# Allegro board SHOWERTERMINAL.brd
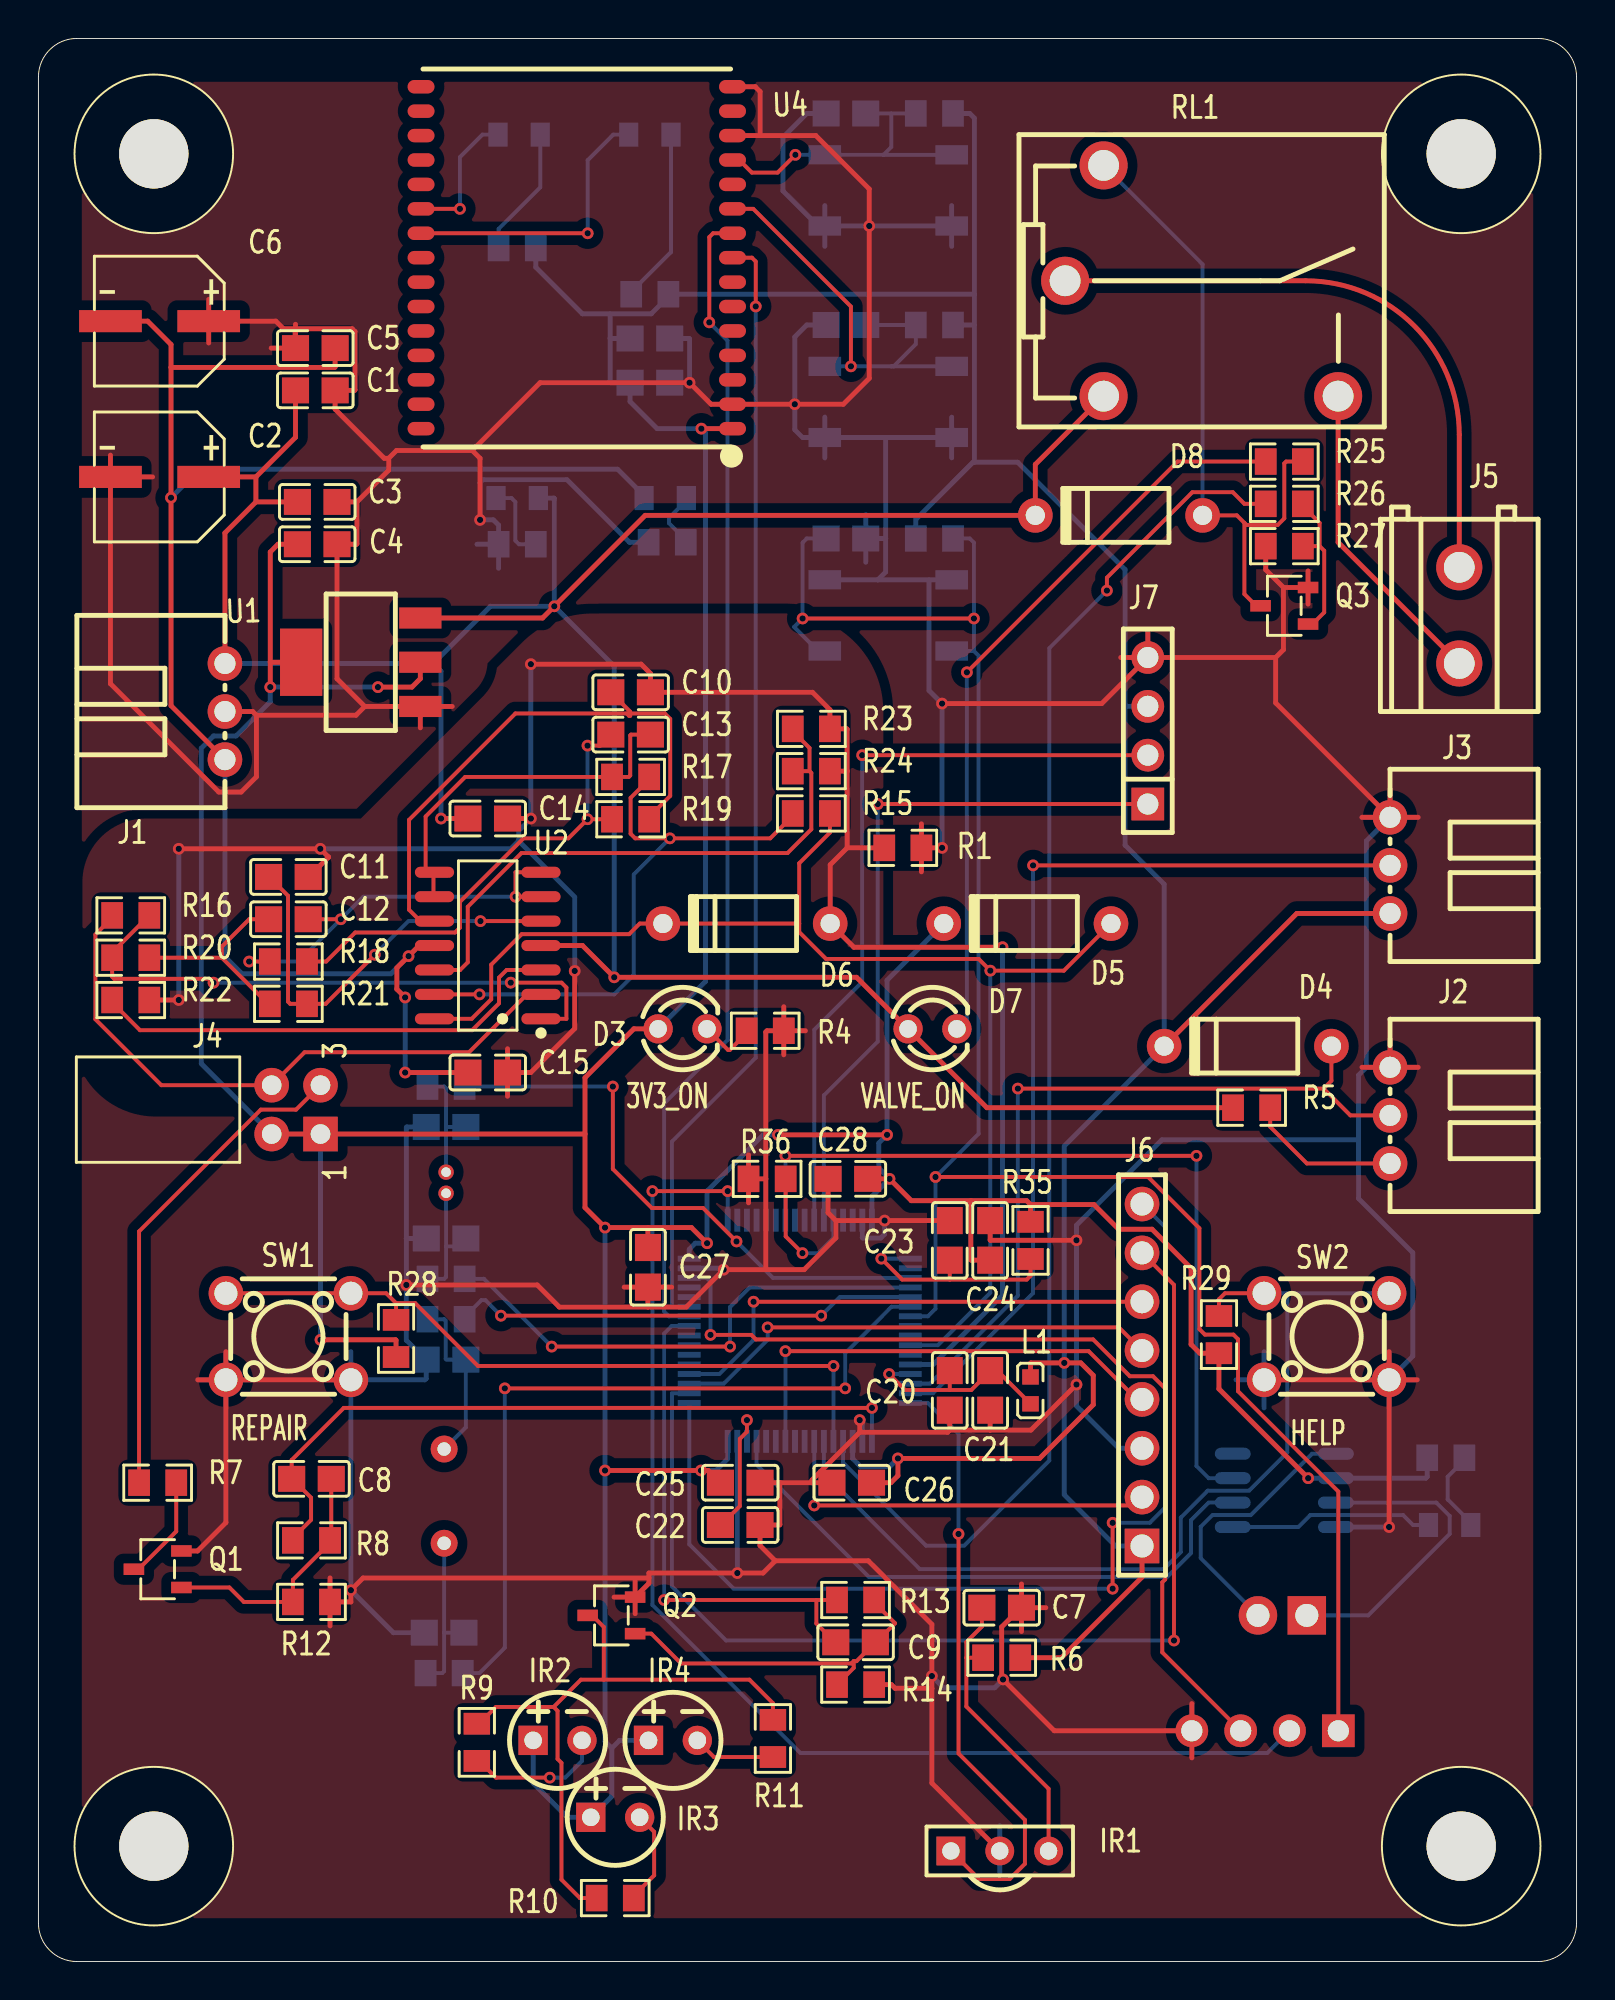
[diagram p0: board, top side]
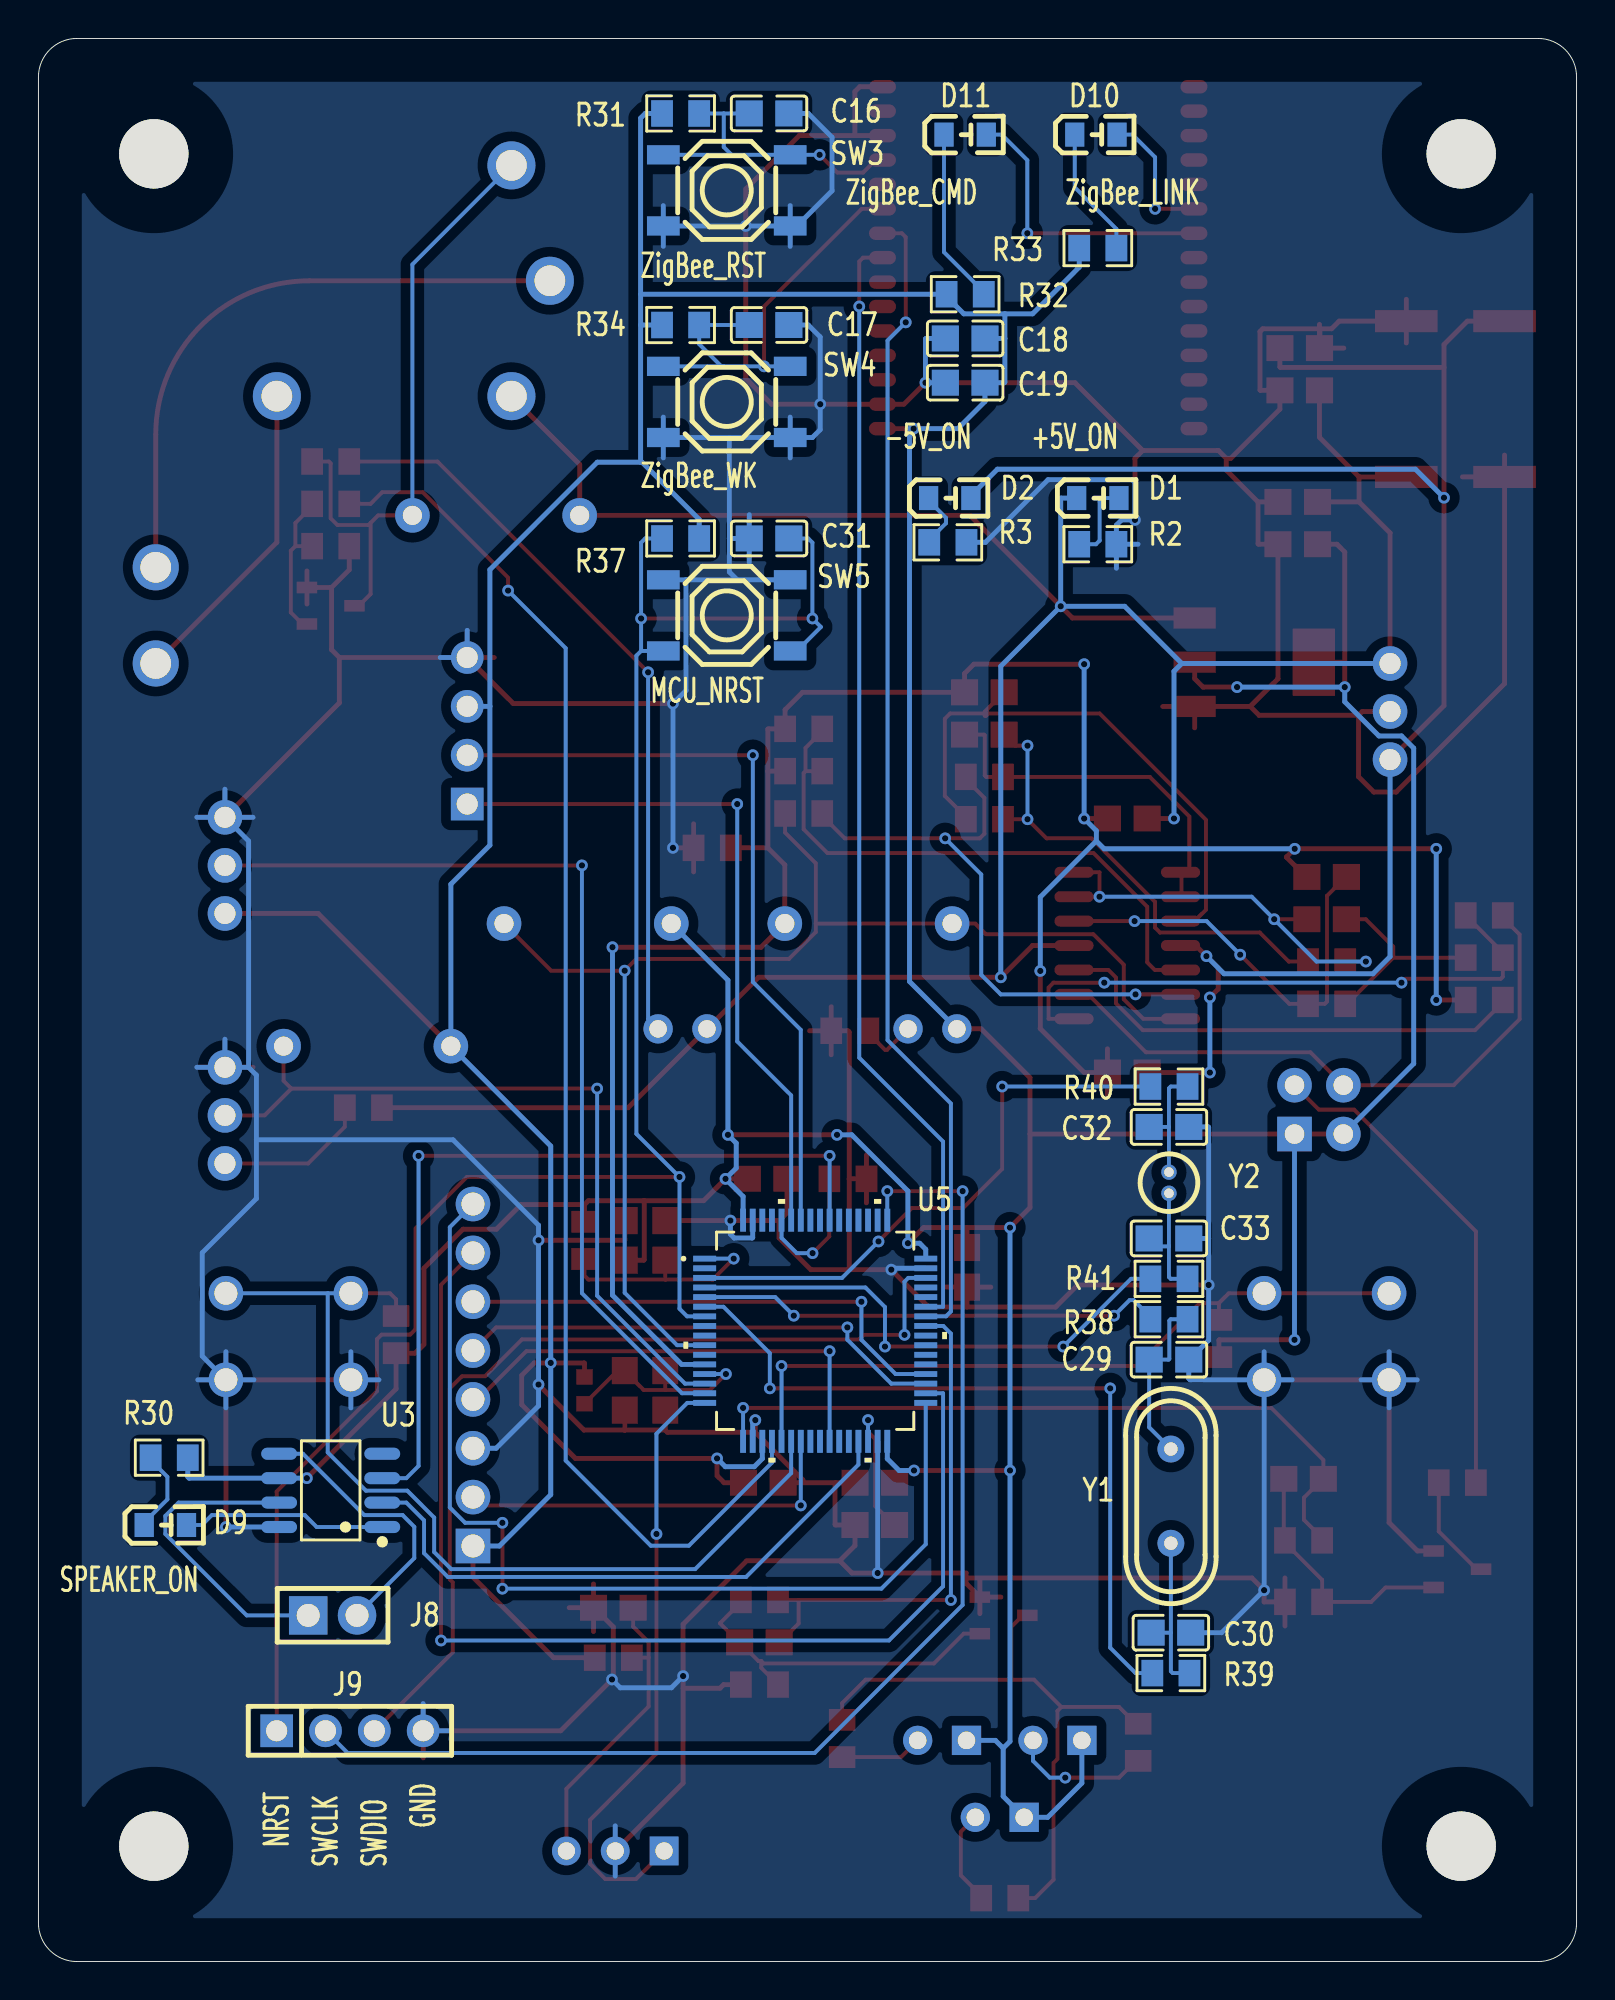
[diagram p1: board, bottom side, seen from below]

Outline 80 x 100 mm; copper layers: TOP, BOTTOM. Coordinates in mm from the lower left corner of the outline.
Outline path: 0,98 arc(0.59,99.41) 2,100 78,100 arc(79.41,99.41) 80,98 80,2 arc(79.41,0.59) 78,0 2,0 arc(0.59,0.59) 0,2 0,98

## Design rules (mm)
constraint set DEFAULT: min track width 0.203, pair gap 0.203
nets with their own width: min track width 0.254; nets 3V3 +5V -5V AGND GND

## Placement (name value [footprint] x y rotation side)
C1  100n  [C0805]  14.4 81.7 0 top
C2  220u  [C-220U]  6.3 77.2 0 top
C3  1u  [C0805]  14.5 75.9 0 top
C4  1u  [C0805]  14.5 73.7 0 top
C5  100n  [C0805]  14.4 83.9 0 top
C6  220u  [C-220U]  6.3 85.3 0 top
C7  47u  [C0805]  50.1 18.4 0 top
C8  100n  [C0805]  14.2 25.1 0 top
C9  100n  [C0805]  42.5 16.6 0 top
C10  100n  [C0805]  30.8 66 0 top
C11  100n  [C0805]  13 56.4 0 top
C12  1u  [C0805]  13 54.2 0 top
C13  1u  [C0805]  30.8 63.8 0 top
C14  100n  [C0805]  23.37 59.44 0 top
C15  100n  [C0805]  23.37 46.23 0 top
C16  100n  [C0805]  42 96.1 180 bottom
C17  100n  [C0805]  42 85.1 180 bottom
C18  10u  [C0805]  31.8 84.4 180 bottom
C19  100n  [C0805]  31.8 82.1 180 bottom
C20  1u  [C0805]  47.4 29.7 90 top
C21  100n  [C0805]  49.5 29.7 90 top
C22  2.2u  [C0805]  36.5 22.7 180 top
C23  1u  [C0805]  47.4 37.5 90 top
C24  100n  [C0805]  49.5 37.5 90 top
C25  100n  [C0805]  42.3 24.9 180 top
C26  100n  [C0805]  36.5 24.9 0 top
C27  100n  [C0805]  31.7 36.1 270 top
C28  100n  [C0805]  42.1 40.7 180 top
C29  20pF  [C0805]  21.2 31.3 180 bottom
C30  20pF  [C0805]  21.1 17.1 180 bottom
C31  100n  [C0805]  42 74 180 bottom
C32  15pF  [C0805]  21.2 43.4 180 bottom
C33  15pF  [C0805]  21.2 37.6 180 bottom
D1  +5V_ON  [LED0805-RD]  24.9 76.1 180 bottom
D2  -5V_ON  [LED0805-RD]  32.6 76.1 180 bottom
D3  3V3_ON  [LED-TH_BD3_0-P2_54-FD]  33.5 48.5 0 top
D4  1N4007  [DO-41_BD2_4-L4_7-P8_70-D0_6-RD]  62.9 47.6 0 top
D5  1N4007  [DO-41_BD2_4-L4_7-P8_70-D0_6-RD]  51.44 53.98 0 top
D6  1N4007  [DO-41_BD2_4-L4_7-P8_70-D0_6-RD]  36.83 53.98 0 top
D7  VALVE_ON  [LED-TH_BD3_0-P2_54-FD]  46.5 48.5 0 top
D8  1N4007  [DO-41_BD2_4-L4_7-P8_70-D0_6-RD]  56.2 75.2 0 top
D9  SPEAKER_ON  [LED0805-RD]  73.4 22.7 180 bottom
D10  ZigBee_LINK  [LED0805-RD]  25 95 180 bottom
D11  ZigBee_CMD  [LED0805-RD]  31.8 95 180 bottom
IR1  IR-56384  [OPTO-TH_IRM-56384]  50 5.75 0 top
IR2  DY-IR333C-A  [LED-TH_BD5_9-P2_54-FD]  27 11.5 0 top
IR3  DY-IR333C-A  [LED-TH_BD5_9-P2_54-FD]  30 7.5 0 top
IR4  DY-IR333C-A  [LED-TH_BD5_9-P2_54-FD]  33 11.5 0 top
J1  RH-30W_PORT  [CONN-TH_3P-P2_50_HX25003-3WAP]  9.7 65 270 top
J2  FLOWMETER_PORT  [CONN-TH_3P-P2_50_HX25003-3WAP]  70.3 44 90 top
J3  DS18B20_PORT  [CONN-TH_3P-P2_50_HX25003-3WAP]  70.3 57 90 top
J4  INFRARED  [CONN-TH_4P-P2_54_DEALON_DW254W-22-04-85]  13.4 44.3 90 top
J5  VALVE_PORT  [CONN-TH_P5_00_KF127-5_0-2P]  73.9 70 270 top
J6  NFC_PORT  [HDR-TH_8P-P2_54-V-F-1]  57.4 30.5 90 top
J7  LCD_PORT  [HDR-TH_4P-P2_54-V-F]  57.7 64 90 top
J8  SPEAKER_PORT  [HDR-TH_2P-P2_54-V-F]  64.7 18 180 bottom
J9  SWD_PORT  [HDR-TH_4P-P2_54-V-F]  63.8 12 180 bottom
L1  FCM1608  [L0603]  51.6 29.7 90 top
NOREF  -  [unnamed]  6 6 0 top
NOREF#2  -  [unnamed]  6 94 0 top
NOREF#3  -  [unnamed]  74 94 0 top
NOREF#4  -  [unnamed]  74 6 0 top
Q1  S8050  [SOT-23-3_L2_9-W1_6-P1_90-LS2_8-BR]  6.2 20.4 0 top
Q2  S8050  [SOT-23-3_L2_9-W1_6-P1_90-LS2_8-BR]  29.8 18 0 top
Q3  S8050  [SOT-23-3_L2_9-W1_6-P1_90-LS2_8-BR]  64.8 70.5 0 top
R1  0  [R0805]  44.96 57.91 180 top
R2  1k  [R0805]  24.9 73.7 180 bottom
R3  1k  [R0805]  32.7 73.8 180 bottom
R4  1k  [R0805]  37.8 48.4 0 top
R5  1k  [R0805]  63.1 44.4 0 top
R6  220  [R0805]  50.1 15.8 0 top
R7  100  [R0805]  6.2 24.9 0 top
R8  11k  [R0805]  14.2 21.9 0 top
R9  100  [R0805]  22.8 11.4 90 top
R10  100  [R0805]  30 3.3 180 top
R11  100  [R0805]  38.2 11.6 90 top
R12  100k  [R0805]  14.2 18.7 0 top
R13  3.9k  [R0805]  42.5 18.8 0 top
R14  10k  [R0805]  42.5 14.4 0 top
R15  10k  [R0805]  40.2 59.7 0 top
R16  620  [R0805]  4.8 54.4 0 top
R17  10k  [R0805]  30.8 61.6 0 top
R18  91k  [R0805]  13 52 0 top
R19  27k  [R0805]  30.8 59.4 0 top
R20  330k  [R0805]  4.8 52.2 0 top
R21  9.1k  [R0805]  13 49.8 0 top
R22  620  [R0805]  4.8 50 0 top
R23  10k  [R0805]  40.2 64.1 0 top
R24  10k  [R0805]  40.2 61.9 0 top
R25  1k  [R0805]  64.8 78 0 top
R26  8.2k  [R0805]  64.8 75.8 0 top
R27  51k  [R0805]  64.8 73.6 0 top
R28  1k  [R0805]  18.6 32.4 90 top
R29  1k  [R0805]  61.4 32.6 90 top
R30  330  [R0805]  73.2 26.2 0 bottom
R31  10k  [R0805]  46.6 96.1 180 bottom
R32  1k  [R0805]  31.8 86.7 180 bottom
R33  1k  [R0805]  24.9 89.1 180 bottom
R34  10k  [R0805]  46.6 85.1 180 bottom
R35  0  [R0805]  51.6 37.5 90 top
R36  10k  [R0805]  37.9 40.7 0 top
R37  100k  [R0805]  46.6 74 180 bottom
R38  0  [R0805]  21.2 33.4 180 bottom
R39  220  [R0805]  21.1 15 180 bottom
R40  0  [R0805]  21.2 45.5 180 bottom
R41  0  [R0805]  21.2 35.5 180 bottom
RL1  973-5VDC-SL-A  [RELAY-TH_973-XXVDC-SL-A]  60.5 87.4 0 top
SW1  REPAIR  [SW-TH_4P-L6_0-W6_0-P4_50-LS6_5]  13 32.5 0 top
SW2  HELP  [SW-TH_4P-L6_0-W6_0-P4_50-LS6_5]  67 32.5 0 top
SW3  ZigBee_RST  [SW-SMD_4P-L5_1-W5_1-P3_70-LS6_5-TL-2]  44.2 92.1 180 bottom
SW4  ZigBee_WK  [SW-SMD_4P-L5_1-W5_1-P3_70-LS6_5-TL-2]  44.2 81.1 180 bottom
SW5  MCU_NRST  [SW-SMD_4P-L5_1-W5_1-P3_70-LS6_5-TL-2]  44.2 70 180 bottom
U1  TLV1117LV33  [SOT-223_L6_7-W3_5-P2_30-BR]  16.76 67.56 0 top
U2  TLV2374  [SOIC-14_L8_7-W3_9-P1_27-LS6_0-BL]  23.37 52.83 90 top
U3  WT588F08A-8S  [SOP-8_L4_9-W3_9-P1_27-LS6_0-BL]  64.8 24.5 90 bottom
U4  A40-C2G4A04S1a  [S24-PAD]  28 88.6 90 top
U5  STM32F401RE  [LQFP64-10X10MM]  39.6 32.8 180 bottom
Y1  8MHz  [OSC-TH_L11_1-W4_7-P4_88]  21.1 24.2 90 bottom
Y2  32.768kHz  [OSC-TH_BD3_0-P1_10-D0_4]  21.2 40.5 270 bottom

## Library data of the parts
C1 C3-C5 C7-C33 = CAP NP
C2 C6 = CAP
D1-D3 D7 D9-D11 IR2-IR4 = LED_1
D4-D6 D8 = DIODE
IR1 = IRM-56384
J1-J3 = CON3
J4 = CON4_0
J5 J8 = CON2
J6 = CON8
J7 J9 = CON4
L1 = CHOKE
Q1-Q3 = BPW36/TO_0
R1-R41 = RESISTOR
RL1 = RELAY SPST
SW1-SW5 = SW PUSHBUTTON-SPST-2
U1 = TLV1117LV33DCYR
U2 = TLV2374ID
U3 = WT588F08A-8S
U4 = A40-C2G4A04S1a_0
U5 = STM32F401RET6_0
Y1 Y2 = CRYSTAL

## Footprints (pads in the part's own frame, mm; a bottom-side part is the same pattern mirrored in y, then rotated)
C0805
  rect 1.41x1.35 smd: 1(-1.03,0) 2(1.03,0)
C-220U
  rect 3.26x1.15 smd: 1(2.555,0) 2(-2.555,0)
CONN-TH_3P-P2_50_HX25003-3WAP
  round 1.8 hole 1.1: 1(-2.5,0) 2(0,0) 3(2.5,0)
CONN-TH_4P-P2_54_DEALON_DW254W-22-04-85
  rect 1.8x1.8 hole 1.02: 1(-1.27,-1.27)
  round 1.8 hole 1.02: 2(-1.27,1.27) 3(1.27,-1.27) 4(1.27,1.27)
CONN-TH_P5_00_KF127-5_0-2P
  round 2.4 hole 1.6: 1(-2.5,0) 2(2.5,0)
DO-41_BD2_4-L4_7-P8_70-D0_6-RD
  round 1.8 hole 1: 1(-4.35,0) 2(4.35,0)
HDR-TH_2P-P2_54-V-F
  rect 2x2 hole 1.2: 1(-1.27,0)
  round 2 hole 1.2: 2(1.27,0)
HDR-TH_4P-P2_54-V-F
  rect 1.7x1.7 hole 1.1: 1(-3.81,0)
  round 1.7 hole 1.1: 2(-1.27,0) 3(1.27,0) 4(3.81,0)
HDR-TH_8P-P2_54-V-F-1
  rect 1.8x1.8 hole 1.2: 1(-8.89,0)
  round 1.8 hole 1.2: 2(-6.35,0) 3(-3.81,0) 4(-1.27,0) 5(1.27,0) 6(3.81,0) 7(6.35,0) 8(8.89,0)
L0603
  rect 0.8x0.864 smd: 1(-0.7,0) 2(0.7,0)
LED0805-RD
  rect 1x1.25 smd: 1(-1.1,0) 2(1.1,0)
LED-TH_BD3_0-P2_54-FD
  round 1.524 hole 0.914: 1(-1.27,0) 2(1.27,0)
LED-TH_BD5_9-P2_54-FD
  rect 1.524x1.524 hole 0.914: 1(-1.27,0)
  round 1.524 hole 0.914: 2(1.27,0)
LQFP64-10X10MM
  rect 1.194x0.305 smd: 1(-5.75,3.75) 2(-5.75,3.25) 3(-5.75,2.75) 4(-5.75,2.25) 5(-5.75,1.75) 6(-5.75,1.25) 7(-5.75,0.75) 8(-5.75,0.25) 9(-5.75,-0.25) 10(-5.75,-0.75) 11(-5.75,-1.25) 12(-5.75,-1.75) 13(-5.75,-2.25) 14(-5.75,-2.75) 15(-5.75,-3.25) 16(-5.75,-3.75) 33(5.75,-3.75) 34(5.75,-3.25) 35(5.75,-2.75) 36(5.75,-2.25) 37(5.75,-1.75) 38(5.75,-1.25) 39(5.75,-0.75) 40(5.75,-0.25) 41(5.75,0.25) 42(5.75,0.75) 43(5.75,1.25) 44(5.75,1.75) 45(5.75,2.25) 46(5.75,2.75) 47(5.75,3.25) 48(5.75,3.75)
  rect 0.305x1.194 smd: 17(-3.75,-5.75) 18(-3.25,-5.75) 19(-2.75,-5.75) 20(-2.25,-5.75) 21(-1.75,-5.75) 22(-1.25,-5.75) 23(-0.75,-5.75) 24(-0.25,-5.75) 25(0.25,-5.75) 26(0.75,-5.75) 27(1.25,-5.75) 28(1.75,-5.75) 29(2.25,-5.75) 30(2.75,-5.75) 31(3.25,-5.75) 32(3.75,-5.75) 49(3.75,5.75) 50(3.25,5.75) 51(2.75,5.75) 52(2.25,5.75) 53(1.75,5.75) 54(1.25,5.75) 55(0.75,5.75) 56(0.25,5.75) 57(-0.25,5.75) 58(-0.75,5.75) 59(-1.25,5.75) 60(-1.75,5.75) 61(-2.25,5.75) 62(-2.75,5.75) 63(-3.25,5.75) 64(-3.75,5.75)
OPTO-TH_IRM-56384
  rect 1.5x1.5 hole 0.9: 1(-2.54,0)
  round 1.5 hole 0.9: 2(0,0) 3(2.54,0)
OSC-TH_BD3_0-P1_10-D0_4
  round 0.8 hole 0.5: 1(-0.55,0) 2(0.55,0)
OSC-TH_L11_1-W4_7-P4_88
  round 1.4 hole 0.7: 1(-2.45,0) 2(2.45,0)
R0805
  rect 1.133x1.377 smd: 1(-0.966,0) 2(0.966,0)
RELAY-TH_973-XXVDC-SL-A
  round 2.5 hole 1.6: 1(-5.1,-6) 2(-5.1,6) 3(7.1,-6) 4(-7.1,0)
S24-PAD
  oval 0.7x1.4 smd: 1(-8.89,-8.1) 2(-7.62,-8.1) 3(-6.35,-8.1) 4(-5.08,-8.1) 5(-3.81,-8.1) 6(-2.54,-8.1) 7(-1.27,-8.1) 8(0,-8.1) 9(1.27,-8.1) 10(2.54,-8.1) 11(3.81,-8.1) 12(5.08,-8.1) 13(6.35,-8.1) 14(7.62,-8.1) 15(8.89,-8.1) 16(8.89,8.1) 17(7.62,8.1) 18(6.35,8.1) 19(5.08,8.1) 20(3.81,8.1) 21(2.54,8.1) 22(1.27,8.1) 23(0,8.1) 24(-1.27,8.1) 25(-2.54,8.1) 26(-3.81,8.1) 27(-5.08,8.1) 28(-6.35,8.1) 29(-7.62,8.1) 30(-8.89,8.1)
SOIC-14_L8_7-W3_9-P1_27-LS6_0-BL
  oval 0.574x2.038 smd: 1(-3.81,-2.769) 2(-2.54,-2.769) 3(-1.27,-2.769) 4(0,-2.769) 5(1.27,-2.769) 6(2.54,-2.769) 7(3.81,-2.769) 8(3.81,2.769) 9(2.54,2.769) 10(1.27,2.769) 11(0,2.769) 12(-1.27,2.769) 13(-2.54,2.769) 14(-3.81,2.769)
SOP-8_L4_9-W3_9-P1_27-LS6_0-BL
  oval 0.63x1.865 smd: 1(-1.905,-2.682) 2(-0.635,-2.682) 3(0.635,-2.682) 4(1.905,-2.682) 5(1.905,2.682) 6(0.635,2.682) 7(-0.635,2.682) 8(-1.905,2.682)
SOT-23-3_L2_9-W1_6-P1_90-LS2_8-BR
  rect 1.07x0.6 smd: 1(1.235,-0.95) 2(1.235,0.95) 3(-1.235,0)
SOT-223_L6_7-W3_5-P2_30-BR
  rect 2.2x1.1 smd: 1(3.099,-2.3) 2(3.099,0) 3(3.099,2.3)
  rect 2.2x3.5 smd: 4(-3.099,0)
SW-SMD_4P-L5_1-W5_1-P3_70-LS6_5-TL-2
  rect 1.7x1 smd: 1(-3.3,1.849) 2(3.3,1.85) 3(-3.3,-1.85) 4(3.3,-1.85)
SW-TH_4P-L6_0-W6_0-P4_50-LS6_5
  round 1.8 hole 1.2: 1(-3.25,2.25) 2(3.25,2.25) 3(-3.25,-2.25) 4(3.25,-2.25)
unnamed
  round 3.6 hole 4.1 unplated: (0,0)

## Nets
3V3: C4.1 C18.2 C19.2 C24.1 C25.1 C26.1 C27.1 C28.1 D3.1 D4.1(K) D5.1(K) IR2.1 IR3.1 IR4.1 J3.1 J4.1 J4.2 J6.1 J7.3 L1.2 R6.2 R28.1 R29.1 R30.1 R31.1 R32.1 R33.1 R34.1 R35.2 R37.2 U1.2 U1.4(OUT#4) U3.6(VDD) U4.1(VCC) U5.19 U5.32 U5.48 U5.64
+5V: C1.1 C2.1 C3.1 C14.1 D1.1 D7.1 D8.1(K) J1.1 R5.1 RL1.1 U1.3 U2.4(VDD)
-5V: C5.2 C6.2 C15.1 D2.2(CATHODE) J1.3 U2.11
AGND: C10.2 C11.2 C14.2 C15.2 D6.2 R1.2 R22.2 R23.2 R24.2 U5.12
GND: C1.2 C2.2 C3.2 C4.2 C5.1 C6.1 C7.2 C16.2 C17.2 C18.1 C19.1 C20.1 C21.1 C22.1 C23.2 C24.2 C25.2 C26.2 C27.2 C28.2 C29.2 C30.2 C31.1 C32.2 C33.2 IR1.2 J1.2 J2.3 J3.3 J6.3 J7.4 J9.4 Q1.2(EMITTER) Q2.2(EMITTER) Q3.2(EMITTER) R1.1 R2.2 R3.2 R4.2 R12.2 R14.2 R27.1 R36.1 SW1.3 SW1.4 SW2.3 SW2.4 SW3.3 SW3.4 SW4.3 SW4.4 SW5.1 SW5.2 U1.1 U3.8 U4.2 U4.13 U4.15 U5.18 U5.31 U5.47 U5.63
1IN+: R22.1 U2.3
1IN-: J4.4 R16.1 U2.2
1OUT: R16.2 R20.1 U2.1
2IN+: C11.1 R21.2 U2.5
2IN-: C12.2 R18.1 U2.6 U2.7
3IN+: C10.1 R19.2 U2.10
3IN-: C13.2 R17.1 U2.8 U2.9
4IN+: R23.1 R24.1 U2.12
4IN-: R15.1 R17.2 U2.13
B1: R28.2 SW1.1 SW1.2 U5.21
B2: R29.2 SW2.1 SW2.2 U5.22
BOOT0: R36.2 U5.60
FLOWMETER: D4.2 J2.2 U5.14
INFRARED_HUMAN_RX: IR1.1 U5.16
INFRARED_HUMAN_TX: C9.1 R13.1 U5.41
INFRARED_LED: J4.3 R7.1
INFRARED_OBJECT_RX: D5.2 D6.1(K) R15.2 U2.14 U5.10
INFRARED_OBJECT_TX: C8.1 R8.1 U5.17
LCD_SCL: J7.2 U5.58
LCD_SDA: J7.1 U5.59
NFC_IRQ: J6.4 U5.26
NFC_MISO: J6.5 U5.35
NFC_MOSI: J6.6 U5.36
NFC_NSS: J6.8 U5.33
NFC_RST: J6.2 U5.23
NFC_SCK: J6.7 U5.34
NRST: C31.2 J9.1 R37.1 SW5.3 SW5.4 U5.7
PA11: U5.44
PA12: U5.45
PA13_SWDIO: J9.3 U5.46
PA14_SWCLK: J9.2 U5.49
PA15: U5.50
PB1: U5.27
PB2: U5.28
PB4: U5.56
PB5: U5.57
PB8: U5.61
PB9: U5.62
PC0: U5.8
PC1: U5.9
PC3: U5.11
PC4: U5.24
PC5: U5.25
PC6: U5.37
PC7: U5.38
PC8: U5.39
PC9: U5.40
PC10: U5.51
PC11: U5.52
PC12: U5.53
PC13: U5.2
PC14-OSC32_IN: R40.1 U5.3
PC15-OSC32_OUT: R41.1 U5.4
PD2: U5.54
PF0-OSC_IN: R38.1 U5.5
PF1-OSC_OUT: R39.1 U5.6(PH1)
SPEAKER_CLK: U3.2 U5.29
SPEAKER_DATA: U3.3 U5.55
TEMPERATURE: J3.2 U5.15
VALVE_CONTROL: R26.1 U5.20
ZIGBEE_RX: U4.9 U5.42
ZIGBEE_TX: U4.8 U5.43
N05685: D1.2(CATHODE) R2.1
N05741: D2.1 R3.1
N05745: D3.2(CATHODE) R4.1
N07506: J2.1 R5.2
N11859: C7.1 IR1.3(VCC) R6.1
N12017: Q2.3 R9.2 R10.2 R11.2
N12089: C9.2 Q2.1 R13.2 R14.1
N12325: Q1.3 R7.2
N12445: C8.2 Q1.1 R8.2 R12.1
N12931: C13.1 R18.2 R19.1
N12977: C12.1 R20.2 R21.1
N21132: D8.2 Q3.3 R25.2 RL1.2
N21196: Q3.1 R26.2 R27.2
N21277: J5.1 RL1.4
N21304: J5.2 RL1.3(NO)
N22504: D9.1 R30.2
N22528: D9.2(CATHODE) U3.1
N22562: J8.1 U3.7
N22566: J8.2 U3.5
N23162: D7.2(CATHODE) R25.1
N41319: C16.1 R31.2 SW3.1 SW3.2 U4.12
N41457: D11.1 R32.2
N41461: D10.1 R33.2
N41469: D10.2(CATHODE) U4.21
N41473: C17.1 R34.2 SW4.1 SW4.2 U4.10
N41513: D11.2(CATHODE) U4.22
N116257: C20.2 C21.2 L1.1 U5.13
N116429: C22.2 U5.30
N116437: C23.1 R35.1 U5.1
N116933: C29.1 R38.2 Y1.2
N117089: C30.1 R39.2 Y1.1
N117191: C32.1 R40.2 Y2.1
N117227: C33.1 R41.2 Y2.2
N118871: IR2.2(CATHODE) R9.1
N119031: IR3.2(CATHODE) R10.1
N119191: IR4.2(CATHODE) R11.1

Pads without a net: U3 4; U4 3 4 5 6 7 11 14 16 17 18 19 20 23 24 25 26 27 28 29 30

## Via types
v1: diameter 0.61, hole 0.33, TOP to BOTTOM, 101 vias

## Routing (per net, layer and track width the routed paths; a pad name or vN(x,y) marks a point on that pad's centre or on a via; arc(x,y) is an arc through that point)
3V3: length 433.5
  TOP w0.254: C25.1 44.34,24.9 44.7,25.26 v1(44.7,26.16) 52.07,26.16 54.86,28.96 54.86,30.48 54.21,31.13 v1(53.36,31.13) 51.63,31.13 51.6,31.1 L1.2 ; R6.2 53.21,15.8 57.4,19.99 J6.1 ; C24.1 48.52,36.47 48.49,36.5 48.49,39.57 ; v1(12.06,66.27) 12.06,67.56 ; 12.06,67.56 12.06,73.3 12.46,73.7 C4.1 ; 12.06,67.56 U1.4 ; U4.1 v1(34.48,79.71) ; C26.1 34.84,25.53 v1(34.46,25.53) v1(29.47,25.53) ; 48.49,39.57 45.4,39.57 v1(44.27,40.7) C28.1 ; 48.49,39.57 51.4,39.57 51.6,39.36 ; R28.1 18.6,32.3 18.57,32.33 v1(14.67,32.33) ; v1(34.78,37.35) 33.96,38.17 31.7,38.17 ; 31.7,38.17 v1(29.47,38.17) 28.43,39.21 28.43,43.03 ; 31.7,38.17 C27.1 ; v1(17.66,66.27) 19.42,66.27 19.86,66.71 U1.2 ; 28.43,43.03 J4.1 J4.2 ; 28.43,43.03 28.43,45.96 30.97,48.5 D3.1 ; v1(38.47,42.99) v1(44.14,42.99) ; D4.1 65.45,54.5 J3.1 ; 51.6,39.36 R35.2 ; 51.6,39.36 54.9,39.36 56.18,38.08 57.92,38.08 59.95,36.05 59.95,32.09 60.41,31.63 R29.1 61.4,29.78 v1(66.04,25.14)
  BOTTOM w0.254: D3.1 34.69,50.96 34.69,79.5 v1(34.48,79.71) 32.18,79.71 30.77,81.12 C19.2 29.76,82.1 29.73,82.13 29.73,84.4 ; U5.48 33.85,37.03 34.17,37.35 v1(34.78,37.35) 34.78,40.07 37.7,42.99 v1(38.47,42.99) ; J6.1 56.02,21.61 53.36,24.28 v1(53.36,31.13) 53.36,42.41 D4.1 58.55,56.02 56.52,58.05 56.52,65.27 ; 48.68,86.7 48.68,95.86 48.44,96.1 R31.1 ; 48.68,86.7 48.68,85.1 ; 48.68,86.7 R32.1 32.77,86.58 31.87,85.68 29.73,85.68 ; v1(29.47,38.17) v1(29.47,25.53) 29.47,11.45 29.82,11.09 ; 29.73,85.68 28.29,85.68 25.87,88.11 R33.1 ; 29.73,85.68 29.73,84.4 ; v1(14.67,32.33) J4.1 ; 29.82,11.09 30.23,11.5 IR4.1 ; 29.82,11.09 29.82,8.59 IR3.1 27.51,7.5 25.73,9.28 IR2.1 ; J7.3 56.52,65.27 ; 56.52,65.27 56.52,72.38 50.93,77.97 48.68,77.97 ; v1(17.66,66.27) v1(12.06,66.27) 12.06,65.51 10.28,63.73 9.1,63.73 8.47,63.1 8.47,46.69 J4.2 ; D5.1 44.14,51.03 v1(44.14,42.99) 43.71,42.56 43.71,41.26 v1(44.27,40.7) 43.35,39.79 U5.64 ; 48.68,85.1 R34.1 ; 48.68,85.1 48.68,77.97 ; U5.19 42.35,26.15 42.77,25.73 44.27,25.73 v1(44.7,26.16) ; v1(66.04,25.14) U3.6 72.16,25.14 72.23,25.21 R30.1 ; C18.2 29.73,84.4 ; 48.68,77.97 48.61,77.97 45.63,74.99 R37.2 ; v1(34.46,25.53) 35.24,25.53 35.85,26.15 U5.32
+5V: length 156.7
  TOP w0.254: U2.4 28.3,52.83 v1(29.95,51.18) 42.55,51.18 D7.1 49.33,44.4 R5.1 ; J1.1 9.7,74.29 11.31,75.9 ; 11.31,75.9 11.31,77.2 ; 11.31,75.9 C3.1 ; U1.3 26.22,69.86 v1(26.83,70.47) 31.56,75.2 D8.1 51.85,77.85 RL1.1 ; 11.31,77.2 C2.1 ; 11.31,77.2 13.37,79.26 C1.1 ; C14.1 v1(20.94,59.44)
  BOTTOM w0.254: v1(26.83,70.47) 26.83,76.07 26.8,76.1 D1.1 ; v1(26.83,70.47) 23.51,70.47 20.53,67.5 ; v1(26.83,70.47) 29.95,67.36 v1(29.95,51.18) ; 20.53,67.5 20.94,67.09 v1(20.94,59.44) ; 20.53,67.5 J1.1
-5V: length 93.7
  TOP w0.254: U2.11 19.8,52.83 v1(19.25,52.28) 18.64,51.67 18.64,50.56 v1(19.07,50.13) ; C6.2 5.68,85.3 6.89,84.08 6.89,82.89 ; C15.1 v1(19.07,46.23) ; 6.89,82.89 15.4,82.89 15.43,82.92 C5.2 ; 6.89,82.89 v1(6.89,76.12) 6.89,65.31 J1.3
  BOTTOM w0.254: v1(6.89,76.12) 8.38,77.6 30.12,77.6 31.5,76.22 D2.2 ; v1(19.25,52.28) 18.34,51.36 10.59,51.36 9.7,52.25 J1.3 ; v1(19.07,46.23) v1(19.07,50.13)
AGND: length 124
  TOP w0.254: C14.2 v1(25.61,59.44) ; R24.2 42.06,61.9 ; 42.06,61.9 42.06,64.07 42.04,64.1 R23.2 41.17,65.09 40.26,66 C10.2 31.83,66.98 31.35,67.46 v1(25.61,67.46) ; 42.06,61.9 42.06,57.91 ; v1(7.3,57.86) v1(14.66,57.86) 15.09,57.43 15.09,57.43 14.06,56.4 C11.2 ; C15.2 24.4,47.46 ; C15.2 25.61,46.23 27.89,48.51 v1(27.89,51.51) ; C15.2 24.4,44.99 ; v1(50.14,52.74) 42.41,52.74 D6.2 41.18,57.03 42.06,57.91 ; R22.2 v1(7.3,50) ; 42.06,57.91 R1.2
  BOTTOM w0.254: 24.98,58.27 27.89,55.35 v1(27.89,51.51) ; 24.98,58.27 24.57,57.86 v1(14.66,57.86) ; 24.98,58.27 24.98,58.8 v1(25.61,59.44) v1(25.61,67.46) ; v1(7.3,50) v1(7.3,57.86) ; U5.12 46.54,31.05 50.14,34.65 v1(50.14,52.74)
GND: length 636.4
  TOP w0.254: SW2.3 SW2.4 ; SW2.4 71.71,30.25 ; SW2.4 v1(70.25,22.6) ; SW2.4 70.25,31.71 ; J3.3 64.35,65.45 64.35,67.81 ; J3.3 70.3,60.96 ; J3.3 71.76,59.5 ; J3.3 68.84,59.5 ; R36.1 37.83,40.7 ; R36.1 36.93,39.45 ; R36.1 36.93,41.95 ; 37.83,40.7 37.83,35.98 ; 37.83,40.7 37.83,48.33 37.9,48.4 R4.2 ; Q1.2 8.27,21.35 9.75,22.83 SW1.3 ; J7.4 55.3,65.41 v1(47,65.41) ; J7.4 57.7,69.22 ; J7.4 56.29,67.81 ; J7.4 64.35,67.81 ; 37.54,94.95 37.54,97.24 37.28,97.49 U4.15 ; 37.54,94.95 U4.13 ; 37.54,94.95 40.43,94.95 43.21,92.17 v1(43.21,90.25) 43.21,82.33 41.86,80.98 v1(39.34,80.98) U4.2 34.99,80.98 v1(33.87,82.1) 26.09,82.1 22.56,78.57 ; 31.7,34.03 33.7,34.03 v1(35.64,35.98) 37.83,35.98 ; 31.7,34.03 C27.2 ; 31.7,34.03 27.09,34.03 25.94,35.18 v1(19.13,35.18) ; v1(53.99,30) 51.62,27.63 49.5,27.63 ; 37.83,35.98 39.83,35.98 41.48,37.63 41.48,38.53 ; 47.4,27.63 49.5,27.63 ; 47.4,27.63 47.29,27.52 42.72,27.52 ; 47.4,27.63 C20.1 ; 49.5,27.63 C21.1 ; 19.86,64.15 U1.1 ; U1.1 21.52,65.26 ; U1.1 16.97,65.26 ; C3.2 16.57,75.9 ; 16.57,75.9 16.57,73.73 16.54,73.7 C4.2 15.53,66.71 16.97,65.26 ; 16.57,75.9 18.22,77.55 18.22,78.17 ; J9.4 52.84,12 v1(50.17,14.67) 50.1,14.74 50.1,17.4 51.1,18.4 C7.2 ; J9.4 59.99,10.59 ; J9.4 59.99,13.41 ; C2.2 3.74,78.33 ; C2.2 3.74,66.45 9.38,60.81 10.54,60.81 11.34,61.61 11.34,64.81 ; C2.2 5.93,77.2 ; J2.3 71.76,46.5 ; J2.3 68.84,46.5 ; J2.3 70.3,47.96 ; C5.1 13.37,85.13 ; C5.1 12.11,83.9 ; C5.1 13.35,83.92 13.35,84.91 ; v1(53.99,37.51) 49.52,37.51 49.5,37.52 C24.2 ; C26.2 38.57,24.9 ; 38.57,24.9 38.57,22.73 38.54,22.7 C22.1 37.53,21.63 38.32,20.84 ; 38.57,24.9 40.23,24.9 ; R1.1 v1(47,57.91) ; R1.1 45.92,56.66 ; R1.1 45.92,59.16 ; 13.35,84.91 12.74,84.91 12.35,85.3 C6.1 ; 13.35,84.91 16.32,84.91 16.47,84.76 16.47,81.73 16.44,81.7 C1.2 15.43,80.72 17.98,78.17 18.22,78.17 ; C27.2 32.93,35.07 ; C27.2 30.47,35.07 ; 18.22,78.17 18.62,78.57 22.56,78.57 ; 42.72,27.52 40.23,25.04 40.23,24.9 ; 42.72,27.52 v1(42.72,28.15) ; 38.32,20.84 43.17,20.84 46.47,17.53 v1(46.47,14.84) 46.47,14.21 ; 38.32,20.84 37.69,20.2 v1(36.35,20.2) 31.75,20.2 31.75,19.94 ; 40.23,24.9 C25.2 ; 41.48,38.53 41.07,38.94 C28.2 ; 41.48,38.53 v1(44.01,38.53) C23.2 ; 8.29,30.25 SW1.3 ; SW1.3 9.75,31.71 ; SW1.3 SW1.4 ; Q3.2 66.03,72.31 ; Q3.2 64.76,71.45 ; Q3.2 66.03,70.59 ; R27.1 63.83,72.37 64.76,71.45 ; 22.56,78.57 22.97,78.17 v1(22.97,74.97) ; R4.2 38.77,49.65 ; R4.2 38.77,47.15 ; R4.2 39.89,48.4 ; R12.2 15.17,19.95 ; R12.2 16.25,18.7 v1(16.25,19.31) 16.88,19.94 31.75,19.94 ; R12.2 15.17,17.45 ; 64.76,71.45 64.76,68.22 64.35,67.81 ; 31.75,19.94 31.75,19.67 Q2.2 ; 16.97,65.26 16.51,64.81 11.34,64.81 ; C7.2 52.39,18.4 ; C7.2 51.13,19.63 ; C7.2 51.13,17.17 ; 11.34,64.81 11.14,65 J1.2 ; 46.47,14.21 44.55,14.21 44.36,14.4 R14.2 ; 46.47,14.21 46.47,9.28 IR1.2 ; 29.94,18.95 Q2.2 ; Q2.2 31.03,18.09 ; Q2.2 31.03,19.81 ; 8.86,84.17 C6.1 ; C6.1 8.86,86.43
  BOTTOM w0.254: SW2.4 70.25,31.71 ; SW2.4 71.71,30.25 ; SW2.4 68.79,30.25 ; SW2.4 70.25,28.79 ; SW2.4 71.48,31.48 71.48,36.86 68.66,39.67 68.66,42.73 ; J2.3 71.76,46.5 ; J2.3 70.3,47.96 ; J2.3 69.07,46.5 ; J3.3 69.07,58.27 69.07,46.5 ; J3.3 70.3,60.96 ; J3.3 71.76,59.5 ; J3.3 68.84,59.5 ; 14.79,30.25 SW1.4 ; SW1.4 16.25,31.71 ; SW1.4 v1(16.25,19.31) 18.46,17.1 C30.2 ; SW1.4 20.1,30.25 20.17,30.32 C29.2 20.14,31.3 19.13,32.31 v1(19.13,35.18) 19.13,37.6 ; 43.66,71.85 SW5.2 ; 43.66,71.85 43.66,71.85 46.32,71.85 ; 43.66,71.85 44.07,72.26 44.07,74 ; 68.66,42.73 68.66,46.09 69.07,46.5 ; 68.66,42.73 58.44,42.73 53.99,38.29 v1(53.99,37.51) v1(53.99,30) 53.99,28.89 56.2,26.69 J6.3 ; SW2.3 63.75,31.71 ; SW2.3 62.29,30.25 ; SW2.3 63.75,28.79 ; SW4.4 40.9,80.31 ; SW4.4 39.75,79.25 39.34,79.66 v1(39.34,80.98) 39.34,84.48 39.96,85.1 C17.2 ; SW4.4 40.9,78.19 ; SW4.4 44.07,79.25 ; C31.1 43.03,75.23 ; C31.1 43.03,72.77 ; C31.1 44.07,74 ; v1(35.64,35.98) 35.57,36.05 U5.47 ; SW1.3 11.21,30.25 ; SW1.3 9.75,28.79 ; SW1.3 9.75,31.71 ; SW1.3 8.29,30.25 ; v1(50.17,14.67) 49.74,14.24 47.08,14.24 v1(46.47,14.84) ; C32.2 19.16,43.4 19.13,43.37 19.13,37.6 ; SW5.1 46.32,71.85 ; 46.32,71.85 46.32,66.09 v1(47,65.41) v1(47,57.91) ; SW3.3 v1(43.21,90.25) SW3.4 ; SW3.3 47.5,89.19 ; SW3.3 47.5,91.31 ; C19.1 v1(33.87,82.1) 33.87,84.37 33.84,84.4 C18.1 ; U3.8 v1(70.25,22.6) ; 19.13,37.6 C33.2 ; U5.18 42.85,28.02 v1(42.72,28.15) ; SW4.3 47.5,80.31 ; SW4.3 47.5,78.19 ; SW4.3 44.07,79.25 ; U5.31 v1(36.35,20.2) ; R3.2 30.74,73.8 27.49,77.06 23.11,77.06 22.97,76.91 v1(22.97,74.97) 23.66,74.97 23.93,74.69 R2.2 ; 40.9,89.19 SW3.4 ; SW3.4 40.55,90.25 38.72,92.08 38.72,94.86 39.96,96.1 C16.2 ; SW3.4 40.9,91.31 ; 58.58,12 J9.4 59.99,13.41 ; 50,4.44 IR1.2 50,7.06 ; 44.07,79.25 44.07,74 ; 57.7,69.22 J7.4 59.11,67.81 ; U5.63 42.85,37.65 42.88,37.62 43.81,37.62 44.01,37.82 v1(44.01,38.53) ; 23.93,72.45 R2.2 ; R2.2 22.81,73.7
1IN+: length 25.1
  TOP w0.203: U2.3 24.35,51.56 23.96,51.16 23.96,49.83 22.56,48.43 5.28,48.43 3.83,49.88 R22.1
1IN-: length 32.3
  TOP w0.203: R16.1 3.83,54.28 2.96,53.41 2.96,49 6.39,45.57 J4.4 13.84,47.28 22.4,47.28 25.41,50.29 U2.2
1OUT: length 30.8
  TOP w0.203: U2.1 27.46,49.02 27.46,50.65 27.21,50.9 v1(24.56,50.9) ; R16.2 3.83,52.47 R20.1 3.83,51.21 3.94,51.1 8.91,51.1 v1(9.1,50.9)
  BOTTOM w0.203: v1(24.56,50.9) v1(9.1,50.9)
2IN+: length 21.9
  TOP w0.203: v1(17.5,52.36) 14.94,49.8 R21.2 13.1,49.8 12.98,49.92 12.98,55.42 12,56.4 C11.1 ; U2.5 v1(22.99,54.1)
  BOTTOM w0.203: v1(17.5,52.36) 19.24,54.1 v1(22.99,54.1)
2IN-: length 21.9
  TOP w0.203: C12.2 v1(15.73,54.2) ; R18.1 v1(10.96,52) ; U2.7 24.81,56.64 v1(24.81,55.37) U2.6
  BOTTOM w0.203: v1(24.81,55.37) 16.9,55.37 v1(15.73,54.2) 13.53,52 v1(10.96,52)
3IN+: length 29.6
  TOP w0.203: U2.10 19.87,54.1 19.28,54.69 19.28,59.37 24.81,64.9 30.6,64.9 30.72,64.78 30.78,64.78 30.78,64.9 ; 30.78,64.9 32.58,64.9 32.86,64.62 32.86,60.61 31.77,59.52 R19.2 ; 30.78,64.9 30.78,64.99 C10.1
3IN-: length 19.3
  TOP w0.203: 20.55,56.64 20.55,55.43 U2.9 ; 20.55,56.64 20.14,56.64 20.14,59.54 22.2,61.6 R17.1 30.7,61.6 30.78,61.68 30.78,63.76 30.82,63.8 C13.2 ; 20.55,56.64 U2.8
4IN+: length 30.8
  TOP w0.203: R23.1 39.23,63.98 40.1,63.11 40.1,61.9 ; U2.12 21.93,51.56 22.33,51.96 22.33,54.85 25.12,57.64 38.96,57.64 40.2,58.88 40.2,61.81 40.1,61.9 ; 40.1,61.9 R24.1
4IN-: length 31.2
  TOP w0.203: R17.2 31.77,61.48 30.8,60.51 30.8,58.65 31.04,58.41 v1(32.84,58.41) 38.06,58.41 39.23,59.58 R15.1 ; U2.13 v1(22.94,50.29)
  BOTTOM w0.203: v1(32.84,58.41) 30.96,56.53 30.96,51.31 29.95,50.29 v1(22.94,50.29)
B1: length 38
  TOP w0.203: R28.2 18.6,34.24 ; 18.6,34.24 18.09,34.75 SW1.2 SW1.1 ; 18.6,34.24 19.59,34.24 22.86,30.97 v1(41.35,30.97)
  BOTTOM w0.203: U5.21 v1(41.35,30.97)
B2: length 49.5
  TOP w0.203: SW2.1 61.71,34.75 61.4,34.44 R29.2
  BOTTOM w0.203: U5.22 40.85,25.4 45.84,20.41 58.53,20.41 59.42,21.29 59.42,23.09 60.81,24.48 62.97,24.48 64.95,26.47 64.95,34.75 ; 64.95,34.75 SW2.1 ; 64.95,34.75 SW2.2
BOOT0: length 7.1
  TOP w0.203: R36.2 38.87,37.71 v1(39.74,36.84)
  BOTTOM w0.203: v1(39.74,36.84) 40.56,36.84 41.35,37.63 U5.60
FLOWMETER: length 40.6
  TOP w0.203: v1(50.94,45.39) 66.84,45.39 ; 66.84,45.39 67.25,45.8 D4.2 ; 66.84,45.39 68.24,44 J2.2
  BOTTOM w0.203: U5.14 46.37,30.05 50.94,34.62 v1(50.94,45.39)
INFRARED_HUMAN_RX: length 31.7
  TOP w0.203: IR1.1 48.92,4.29 50.52,4.29 51.31,5.08 51.31,7.37 47.86,10.82 v1(47.86,22.23)
  BOTTOM w0.203: v1(47.86,22.23) 47.86,27.45 46.25,29.05 U5.16
INFRARED_HUMAN_TX: length 27
  TOP w0.203: 40.46,18.8 40.46,17.58 41.44,16.6 C9.1 ; 40.46,18.8 v1(32.54,18.8) ; 40.46,18.8 R13.1
  BOTTOM w0.203: v1(32.54,18.8) 32.54,32.65 32.94,33.05 U5.41
INFRARED_LED: length 25.7
  TOP w0.203: R7.1 5.23,37.97 11.57,44.3 13.4,44.3 J4.3
INFRARED_OBJECT_RX: length 69
  TOP w0.203: D5.2 53.34,51.53 v1(49.51,51.53) 48.9,52.14 40.97,52.14 39.57,53.53 39.57,53.98 ; 39.57,53.98 39.57,57.11 41.17,58.71 R15.2 ; 39.57,53.98 D6.1 31.28,53.98 30.72,53.42 25.14,53.42 23.55,51.84 23.55,50.04 22.53,49.02 U2.14
  BOTTOM w0.203: U5.10 46.78,32.05 49.51,34.78 v1(49.51,51.53)
INFRARED_OBJECT_TX: length 38.1
  TOP w0.203: v1(43.35,28.79) 15.88,28.79 13.17,26.08 C8.1 13.2,25.1 14.18,24.12 14.18,22.97 13.23,22.02 R8.1
  BOTTOM w0.203: U5.17 v1(43.35,28.79)
LCD_SCL: length 40.1
  TOP w0.203: J7.2 v1(42.84,62.73)
  BOTTOM w0.203: U5.58 40.35,48.45 42.84,50.94 v1(42.84,62.73)
LCD_SDA: length 36.8
  TOP w0.203: J7.1 v1(43.66,60.19)
  BOTTOM w0.203: U5.59 40.85,45.04 43.66,47.85 v1(43.66,60.19)
NFC_IRQ: length 24.3
  TOP w0.203: v1(38.85,31.74) 54.62,31.74 57.13,29.23 J6.4
  BOTTOM w0.203: U5.26 v1(38.85,31.74)
NFC_MISO: length 25.6
  TOP w0.203: v1(37.93,32.98) 56.19,32.98 J6.5
  BOTTOM w0.203: v1(37.93,32.98) 37.93,32.34 35.64,30.05 U5.35
NFC_MOSI: length 26.3
  TOP w0.203: J6.6 v1(37.2,34.31)
  BOTTOM w0.203: U5.36 35.42,30.55 37.2,32.33 v1(37.2,34.31)
NFC_NSS: length 53.1
  TOP w0.203: v1(55.87,19.39) v1(55.87,22.82)
  BOTTOM w0.203: v1(55.87,22.82) 57.81,22.82 58.6,23.61 58.6,38.19 J6.8 ; U5.33 33.85,21.7 36.16,19.39 v1(55.87,19.39)
NFC_RST: length 20.6
  TOP w0.203: v1(40.35,23.72) 56.97,23.72 J6.2
  BOTTOM w0.203: U5.23 v1(40.35,23.72)
NFC_SCK: length 59.1
  TOP w0.203: v1(59.06,16.7) 59.06,35.19 J6.7
  BOTTOM w0.203: U5.34 32.95,29.55 32.95,19.51 35.76,16.7 v1(59.06,16.7)
NRST: length 106.4
  TOP w0.203: J9.1 67.61,24.44 62.39,29.66 62.39,32.36 62.15,32.6 60.67,32.6 60.38,32.89 60.38,38.13 57.72,40.8 v1(46.66,40.8) ; v1(48.66,69.84) v1(39.75,69.84)
  BOTTOM w0.203: 48.66,68.15 v1(48.66,69.84) 48.66,73.78 48.44,74 R37.1 ; 48.66,68.15 48.9,67.91 48.9,43.04 v1(46.66,40.8) 46.66,33.95 46.26,33.55 U5.7 ; 48.66,68.15 SW5.3 ; C31.2 39.96,74 39.75,73.78 v1(39.75,69.84) 39.31,69.41 39.31,69.39 40.55,68.15 SW5.4
PA13_SWDIO: length 48.3
  TOP w0.203: v1(34.95,32.59) 37.08,32.59 37.31,32.35 54.85,32.35 56.77,30.44 57.97,30.44 58.6,29.8 58.6,19.87 58.45,19.72 58.45,16.08 J9.3
  BOTTOM w0.203: U5.46 34.76,35.55 34.95,35.35 v1(34.95,32.59)
PA14_SWCLK: length 63.8
  TOP w0.203: v1(35.85,40.06) v1(31.93,40.06)
  BOTTOM w0.203: U5.49 v1(35.85,40.06) ; v1(31.93,40.06) 31.93,18.54 39.63,10.85 63.92,10.85 J9.2
PC14-OSC32_IN: length 29.8
  TOP w0.203: v1(29.87,45.5) 29.87,41.21 31.91,39.18 34.57,39.18 v1(36.31,37.45)
  BOTTOM w0.203: v1(36.31,37.45) 38.2,35.55 U5.3 ; R40.1 v1(29.87,45.5)
PC15-OSC32_OUT: length 27.1
  TOP w0.203: v1(35.97,31.98) v1(26.7,31.98)
  BOTTOM w0.203: v1(35.97,31.98) 35.97,34.03 36.99,35.05 U5.4 ; R41.1 23.17,35.5 v1(26.7,31.98)
PF0-OSC_IN: length 24.4
  TOP w0.203: v1(40.71,33.58) v1(24.05,33.58)
  BOTTOM w0.203: R38.1 22.17,33.52 23.04,34.39 23.25,34.39 v1(24.05,33.58) ; U5.5 41.68,34.55 v1(40.71,33.58)
PF1-OSC_OUT: length 40.1
  TOP w0.203: v1(41.96,29.81) v1(24.26,29.81)
  BOTTOM w0.203: R39.1 22.94,15 24.26,16.32 v1(24.26,29.81) ; v1(41.96,29.81) 41.96,31.64 44.37,34.05 U5.6
SPEAKER_CLK: length 31
  BOTTOM w0.203: U5.29 37.35,25.84 43.19,20 58.71,20 59.94,21.24 59.94,22.94 60.87,23.87 U3.2
SPEAKER_DATA: length 43
  TOP w0.203: v1(38.85,41.9) v1(60.23,41.9)
  BOTTOM w0.203: U3.3 60.87,25.14 60.23,25.77 v1(60.23,41.9) ; U5.55 v1(38.85,41.9)
TEMPERATURE: length 49.3
  TOP w0.203: J3.2 v1(51.73,57)
  BOTTOM w0.203: v1(51.73,57) 51.73,34.76 46.53,29.55 U5.15
VALVE_CONTROL: length 73
  TOP w0.203: v1(55.57,71.29) 55.57,71.96 60.02,76.4 62.12,76.4 62.73,75.8 R26.1
  BOTTOM w0.203: U5.20 41.85,25.94 46.17,21.62 48.15,21.62 52.58,26.05 52.58,68.3 v1(55.57,71.29)
ZIGBEE_RX: length 60.3
  TOP w0.203: v1(34.89,85.24) 34.89,89.67 35.09,89.87 U4.9
  BOTTOM w0.203: U5.42 32.8,33.55 32.54,33.8 32.54,44.62 35.84,47.91 35.84,84.29 v1(34.89,85.24)
ZIGBEE_TX: length 58.3
  TOP w0.203: v1(37.31,86.07) 37.31,88.4 37.11,88.6 U4.8
  BOTTOM w0.203: U5.43 32.95,34.05 32.95,42.64 37.31,47 v1(37.31,86.07)
N05685: length 4.2
  BOTTOM w0.203: D1.2 24.6,76.1 24.8,75.9 24.8,73.89 25,73.7 R2.1
N05741: length 3
  BOTTOM w0.203: R3.1 33.67,73.92 32.8,74.79 32.8,75.07 33.7,75.97 D2.1
N05745: length 3
  TOP w0.203: D3.2 35.86,47.41 35.96,47.41 36.83,48.28 R4.1
N07506: length 8
  TOP w0.203: J2.1 65.97,41.5 64.07,43.41 R5.2
N11859: length 15.6
  TOP w0.203: C7.1 49.07,17.42 48.26,16.61 48.26,15.8 ; IR1.3 52.54,8.98 48.26,13.26 48.26,15.8 ; R6.1 48.26,15.8
N12017: length 32.9
  TOP w0.203: R10.2 28.16,3.3 27.2,4.26 27.2,10.33 27,10.53 27,13.03 26.8,13.24 ; 29.4,14.66 36.98,14.66 38.2,13.44 R11.2 ; 29.4,14.66 29.4,17.39 28.8,18 Q2.3 ; 29.4,14.66 28.22,14.66 26.8,13.24 ; 26.8,13.24 23.79,13.24 22.92,12.37 R9.2
N12089: length 18.3
  TOP w0.203: 42.4,15.62 42.28,15.5 33.43,15.5 31.87,17.05 Q2.1 ; 42.4,15.62 42.4,15.27 R14.1 ; 42.4,15.62 42.55,15.62 C9.2 43.56,16.6 44.54,17.58 44.54,17.6 43.47,18.68 R13.2
N12325: length 5.5
  TOP w0.203: R7.2 7.17,22.37 5.2,20.4 Q1.3
N12445: length 13.3
  TOP w0.203: C8.2 15.23,21.96 R8.2 15.17,21.78 13.23,19.85 R12.1 10.68,18.7 9.93,19.45 Q1.1
N12931: length 25
  TOP w0.203: R18.2 14.96,52 16.47,53.51 21.67,53.51 21.92,53.76 21.92,55.1 25.22,58.41 27.56,58.41 v1(28.56,59.4) R19.1 ; C13.1 29.2,63.23 v1(28.56,63.23)
  BOTTOM w0.203: v1(28.56,59.4) v1(28.56,63.23)
N12977: length 10.9
  TOP w0.203: 9.54,52.2 9.54,52.78 10.96,54.2 C12.1 ; 9.54,52.2 R20.2 ; 9.54,52.2 11.94,49.8 R21.1
N21132: length 33.6
  TOP w0.203: D8.2 62.33,75.2 62.72,74.81 ; 62.72,74.81 62.83,74.7 64.45,74.7 64.8,75.05 64.8,77.9 64.9,78 R25.2 ; 62.72,74.81 62.72,71.11 63.33,70.5 Q3.3
  BOTTOM w0.203: D8.2 60.55,88.25 RL1.2
N21196: length 8.1
  TOP w0.203: 66.64,73.6 66.64,74.81 65.77,75.68 R26.2 ; 66.64,73.6 R27.2 ; 66.64,73.6 66.87,73.36 66.87,70.16 66.27,69.55 Q3.1
N21277: length 32
  TOP w0.254: RL1.4 65.9,87.4 arc(71.56,85.06) 73.9,79.4 J5.1
N21304: length 16.5
  TOP w0.254: J5.2 67.6,73.8 RL1.3
N22504: length 4.4
  BOTTOM w0.203: R30.2 74.17,26.08 73.3,25.21 73.3,24.03 74.5,22.82 D9.1
N22528: length 10.7
  BOTTOM w0.203: U3.1 65.53,22.6 66.15,23.21 70.98,23.21 71.5,22.7 D9.2
N22562: length 16.3
  BOTTOM w0.203: U3.7 72.71,23.87 73.4,23.17 73.4,22.23 69.17,18 J8.1
N22566: length 14.4
  BOTTOM w0.203: U3.5 66.25,26.41 63.05,23.21 61.06,23.21 60.45,22.61 60.45,20.98 J8.2
N23162: length 38.8
  TOP w0.203: R25.1 59.25,78 v1(48.29,67.04)
  BOTTOM w0.203: D7.2 48.29,49.02 v1(48.29,67.04)
N41319: length 17
  TOP w0.203: v1(39.37,93.95) 38.44,93.02 37.11,93.02 36.45,93.68 U4.12
  BOTTOM w0.203: 43.95,93.95 43.95,93.95 SW3.1 ; 43.95,93.95 44.36,94.36 44.36,96.1 ; 43.95,93.95 SW3.2 v1(39.37,93.95) ; C16.1 44.36,96.1 ; 44.36,96.1 R31.2
N41457: length 9.2
  BOTTOM w0.203: R32.2 30.83,86.82 32.9,88.89 D11.1
N41461: length 6.8
  BOTTOM w0.203: R33.2 23.93,90.09 26.1,92.26 D10.1
N41469: length 7.2
  TOP w0.203: U4.21 v1(21.92,91.14)
  BOTTOM w0.203: D10.2 23.1,95 21.92,93.83 v1(21.92,91.14)
N41473: length 23.3
  TOP w0.203: v1(42.26,82.95) 42.26,86.06 37.18,91.14 U4.10
  BOTTOM w0.203: SW4.2 v1(42.26,82.95) 44.36,82.95 ; 44.36,82.95 SW4.1 ; 44.36,82.95 44.48,82.95 45.63,84.11 R34.2 C17.1
N41513: length 15.2
  TOP w0.203: U4.22 v1(28.57,89.87)
  BOTTOM w0.203: D11.2 29.9,95 28.57,93.67 v1(28.57,89.87)
N116257: length 11
  TOP w0.203: C20.2 47.4,29.72 ; 47.4,29.72 48.52,29.72 49.5,30.7 C21.2 49.87,30.73 L1.1 ; 47.4,29.72 45.08,29.72 v1(44.25,30.55)
  BOTTOM w0.203: U5.13 v1(44.25,30.55)
N116429: length 7.1
  TOP w0.203: C22.2 35.5,22.7 36.48,23.68 36.48,27.18 36.85,27.55 v1(36.85,28.15)
  BOTTOM w0.203: U5.30 v1(36.85,28.15)
N116437: length 11.7
  TOP w0.203: R35.1 51.6,35.66 51.4,35.46 47.4,35.46 ; v1(43.84,36.55) 44.93,35.46 47.4,35.46 ; 47.4,35.46 C23.1
  BOTTOM w0.203: U5.1 v1(43.84,36.55)
N116933: length 9.1
  BOTTOM w0.203: Y1.2 22.23,27.78 C29.1 21.22,31.3 21.18,31.34 21.18,33.32 21.1,33.4 R38.2
N117089: length 8.7
  BOTTOM w0.203: 21.1,17.1 21.1,15.1 21,15 R39.2 ; 21.1,17.1 C30.1 ; 21.1,17.1 Y1.1
N117191: length 6.4
  BOTTOM w0.203: C32.1 21.2,43.4 ; 21.2,43.4 21.2,45.4 21.1,45.5 R40.2 ; 21.2,43.4 Y2.1
N117227: length 6.6
  BOTTOM w0.203: C33.1 21.82,37.19 21.2,37.19 ; R41.2 21.1,35.5 21.2,35.6 21.2,37.19 ; 21.2,37.19 Y2.2
N118871: length 7.3
  TOP w0.203: v1(26.59,9.56) 23.79,9.56 22.92,10.43 R9.1
  BOTTOM w0.203: v1(26.59,9.56) 27.4,9.56 28.27,10.43 IR2.2
N119031: length 5
  TOP w0.203: IR3.2 32.02,6.75 32.02,4.48 30.97,3.42 R10.1
N119191: length 4.3
  TOP w0.203: R11.1 35.14,10.63 IR4.2

## Copper pours and planes (outline as drawn; the poured copper is in the pictures)
AGND on TOP: 29.08,70.1 29.21,70.1 38.86,70.1 42.45,68.62 43.94,65.02 43.94,52.58 43.5,51.5 42.42,51.05 34.8,51.05 28.19,44.45 6.1,44.45 3.4,45.57 2.29,48.26 2.29,56.13 3.25,58.47 5.59,59.44 16.76,59.44 23.11,65.79 23.6,66.47 23.85,67.28 25.15,68.58 26.89,69.73 28.96,70.1 ; 11 cut-outs
GND on TOP: 77.75,2.25 2.25,2.25 2.25,97.75 77.75,97.75 ; 26 cut-outs
GND on BOTTOM: 77.75,2.25 2.25,2.25 2.25,97.75 77.75,97.75 ; 33 cut-outs

## Text on the board
Ref Des/Silkscreen Bottom: ZigBee_LINK | +5V_ON | -5V_ON | ZigBee_CMD | MCU_NRST | ZigBee_RST | ZigBee_WK | SPEAKER_ON | GND | SWDIO | SWCLK | NRST
Board Geometry/Soldermask Top: SHOWERTERMINAL V1 | 20220504 Wes.
Ref Des/Silkscreen Top: REPAIR | 3V3_ON | VALVE_ON | HELP
NCLEGEND-1-2: FIGURE | FINISHED_SIZE | 13.0 | 161.42 | 19.69x19.69 | 27.56x27.56 | 35.43x35.43 | 36.0x36.0 | 39.37x39.37 | 40.16x40.16 | 43.31x43.31 | 47.24x47.24 | 62.99x62.99 | DRILL CHART: TOP to BOTTOM | ALL UNITS ARE IN MILS | ROTATION | - | 90.000 | 0.000 | PLATED | NON-PLATED | QTY | 101 | 4 | 2 | 3 | 10 | 8 | 13
